# Altium PCB attenuator-pcb - 2.PcbDoc
Units mm, origin at the board's own origin, x right, y up, seen from the top; angles counter-clockwise.
Board outline 38.59 x 22.51 mm, 2 copper layers (Top Layer, Bottom Layer), stack 1.56 mm thick; 10 components, 37 nets, 26 pads, 35 vias.
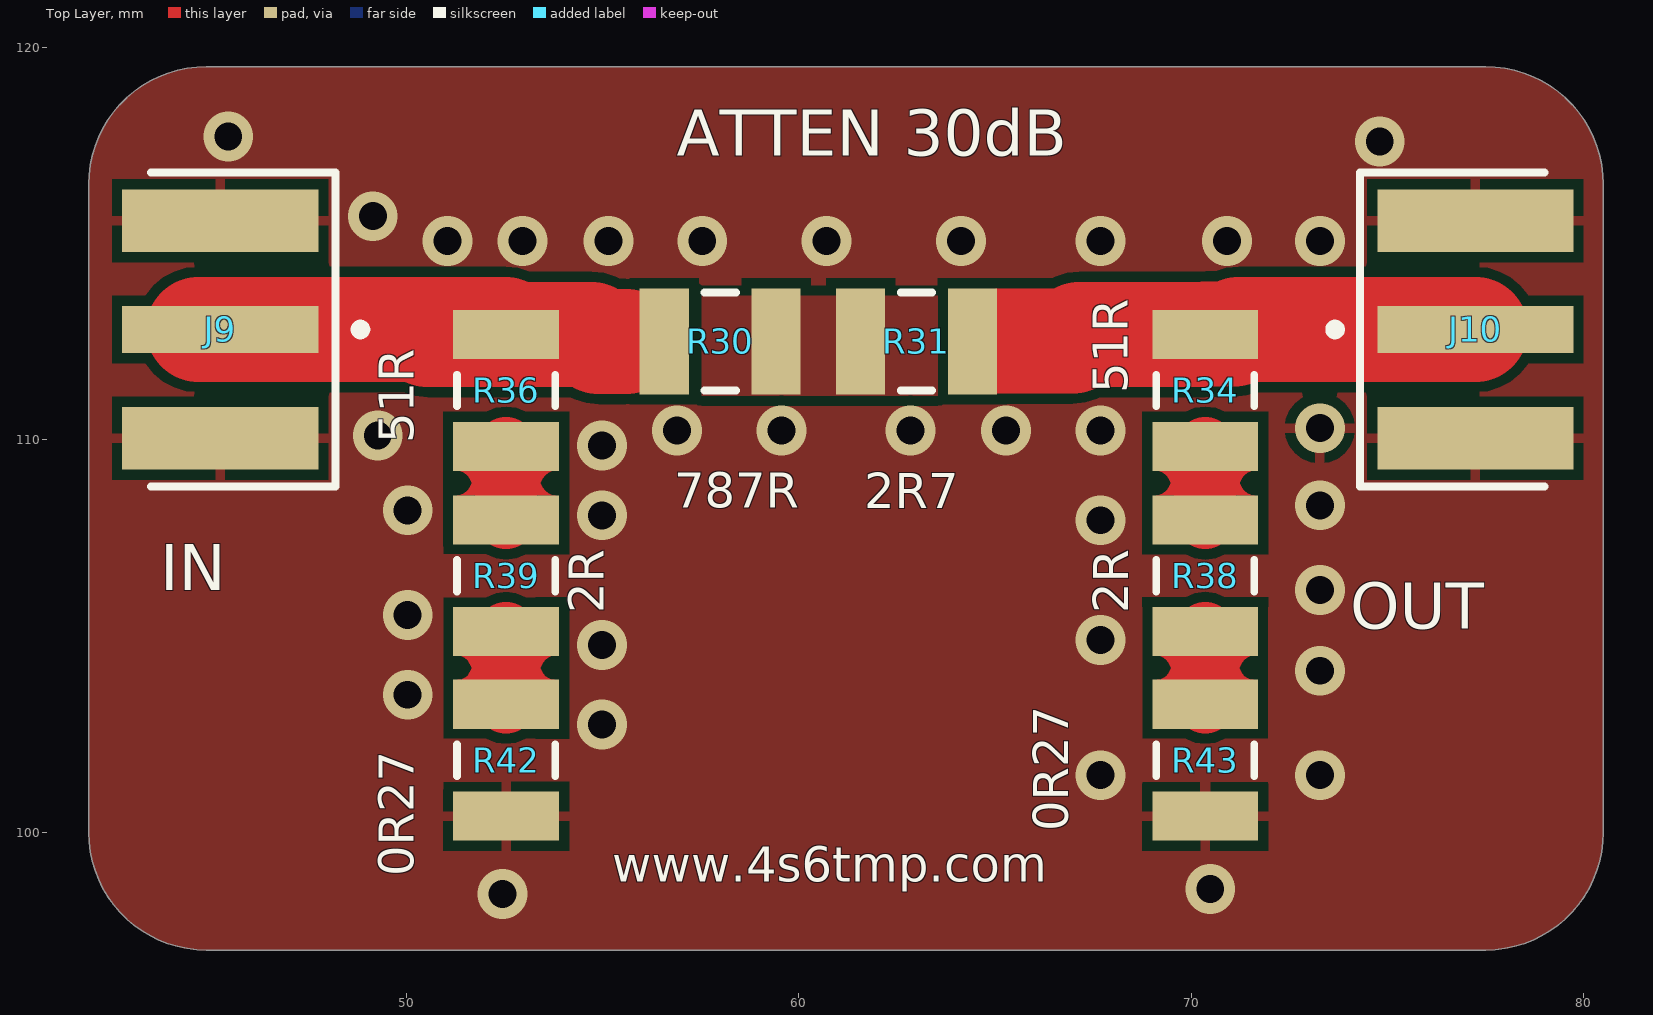
[diagram p0: Top Layer view]
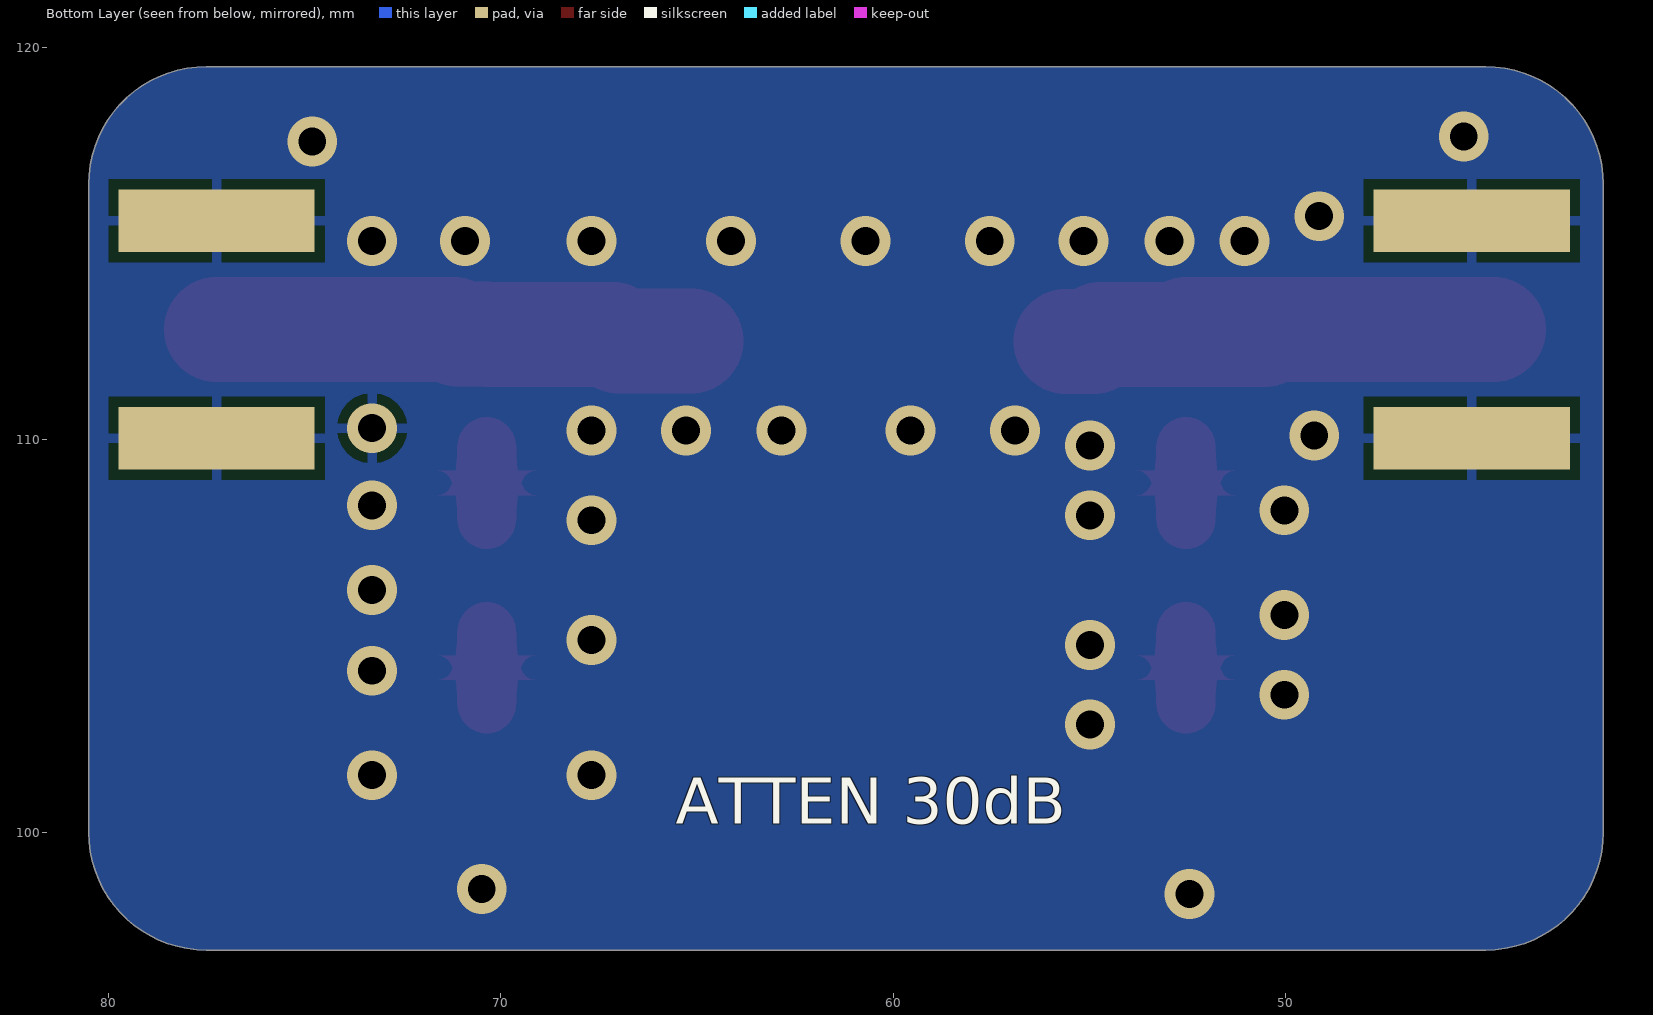
[diagram p1: Bottom Layer view, seen from below]

## Layer stack, top to bottom
Top Solder: solder mask 0.0203, Solder Resist, Dk 3.8
Top Layer: signal copper 0.035
Prepreg 7628: dielectric 1.49, FR-4, Dk 4.6
Bottom Layer: signal copper 0.035
Bottom Solder: solder mask 0.0203, Solder Resist, Dk 3.8

## Board outline
41.91,100 41.91,116.507 cw(c44.91,116.507) 44.91,119.507 77.5,119.507 cw(c77.5,116.507) 80.5,116.507 80.5,100 cw(c77.5,100) 77.5,97 44.91,97 cw(c44.91,100)

## Design rules (kind name [scope] priority, off if disabled: settings)
Clearance [All] p1: gap=0.254 ignorepadtopadclearanceinfootprint=FALSE except(0: Arc-Hole Track-Hole SMDPad-Hole THPad-Hole Via-Hole Fill-Hole Poly-Hole Region-Hole Text-Hole)
HoleToHoleClearance [All] p1: gap=0.1 allowstackedmicrovias=TRUE
MinimumSolderMaskSliver [All] p1 off: minsoldermaskwidth=0.1
PolygonConnect [All] p1: connectstyle=Relief reliefconductorwidth=0.254 reliefentries=4 polygonreliefangle="90 Angle" airgapwidth=0.254
RoomDefinition schematic [InComponentClass('schematic')] p1: confinementstyle=ConfineIn formatcopy=TRUE lockcomponents=FALSE outline 28.829,93.726 92.964,93.726 92.964,120.015 28.829,120.015
RoutingVias [All] p1: holewidth=0.711 width=1.27 viastyle="Through Hole" minholewidth=0.711 minwidth=1.27 maxholewidth=0.711 maxwidth=1.27
SolderMaskExpansion [All] p1: expansion=0.102 istentingtop=FALSE
Width [All] p1: maxlimit=3 minlimit=1.5 preferedwidth=2.673 impedanceprofiledriven=TRUE impedanceprofileid={88FF0C83-8680-40BB-AEE6-F79FA2882ED4} impedanceprofilevalue=50.000000 minimp=50.000000 maximp=50.000000 favimp=50.000000
Width Width_1 [All] p2: maxlimit=2 minlimit=0.254 preferedwidth=1 minimp=50.000000 maximp=50.000000 favimp=50.000000
28 further rules are at their usual default settings.

## Components (designator, comment, footprint, x,y, rotation, side; value= is the part's Value field where it differs from the comment)
J9 "IN" FP-CON-SMA-EDGE-S-MFG 38,112.811 r90 top
J10 "OUT" FP-CON-SMA-EDGE-S-MFG 84.5,112.811 r270 top
R30 "787R" RESC3225X70X50NL20T20 58,112.506 r0 top
R31 "2R7" RESC3225X70X50NL20T20 63,112.506 r0 top
R34 "51R" RESC3225X70X50NL20T20 70.358,111.259 r90 top
R36 "51R" RESC3225X70X50NL20T20 52.546,111.259 r90 top
R38 "2R" RESC3225X70X50NL20T20 70.358,106.537 r90 top
R39 "2R" RESC3225X70X50NL20T20 52.546,106.537 r90 top
R42 "0R27" RESC3225X70X50NL20T20 52.546,101.838 r90 top
R43 "0R27" RESC3225X70X50NL20T20 70.358,101.838 r90 top

## Footprints (in the part's own frame and the unit in brackets; to place one, negate y for a bottom-side part, rotate by r counter-clockwise, add the part's x,y. Pads: shape width x height; smd on the part's side, far side on the other; paste and mask are expansions set on the pad)
FP-CON-SMA-EDGE-S-MFG [mm]
  rect 1.2x5 smd paste+0 mask+0: 1(0,-7.26)
  rect 1.6x5 smd paste+0 mask+0: 2(-2.77,-7.26) 3(2.77,-7.26)
  rect 1.6x5 smd far side paste+0 mask+0: 4(-2.77,-7.26) 5(2.77,-7.26)
  silkscreen extent -4,-10.96 4,-5.5, body extent -3.67,-9.86 3.67,4.86, height 0.25
RESC3225X70X50NL20T20 [mm] "Chip Resistor, 2-Leads, Body 3.20x2.50mm, IPC Medium Density"
  rect 1.25x2.7 smd: 1(-1.425,0) 2(1.425,0)
  silkscreen extent -0.4,-1.25 0.4,1.25, body extent -1.7,-1.35 1.7,1.35, height 0.7

## Part data
J9 J10: library part CMP-204357-000001-1, "CONN SMA JACK STR EDGE MNT", Frequency=18GHz, Manufacturer="RF Solutions Ltd.", Manufacturer Part Number=CON-SMA-EDGE-S, Package=CONN_JACK, Automotive=No, Category=Conn, ComponentLink2Description=Datasheet, ComponentLink2URL=https://www.rfsolutions.co.uk/downloads/1498648656DS-CON-EDGE-SMA-4.pdf, Conn Orientation="Right Angle", Contact Material=Gold, Device Class L1=Connectors, Device Class L2="RF / Coaxial Connectors", Device Class L3=unset, Digikey Description="CONN SMA JACK STR EDGE MNT", Footprint Url=https://forum.upverter.com/uploads/default/original/3X/b/e/be75b907af57498775929d6d9099689c472e0307.pdf, Height=6.35mm, Impedance=50Ω, Is Female=yes, Lead Free=Yes, Number Of Contacts=1, Octopart=https://octopart.com/con-sma-edge-s-rf+solutions-70967450, RoHS=TRUE, Shielding=true
R30 R31 R34 R36 R38 R39 R42 R43: library part CMP-2005-01957-1, Manufacturer=Panasonic, Part Number=ERJ-14NF1001U

## Via types
v1: diameter 1.27, hole 0.711, Top Layer to Bottom Layer, 35 vias

## Nets (pads, with @x,y where several pads share a name; then routed paths per layer and width w, separated by ;. In a path a pad name is that pad's centre, name@x,y a point inside that pad or via, vN(x,y) a via of type N, cw(c..) or ccw(c..) an arc to the next point about the centre after c; other vN are vias at no path point)
GND: J9.2 J9.3 J9.4 J9.5 J10.2 J10.3 J10.4 J10.5 R42.1 R43.1
  other v1: 52.451,98.425 70.485,98.552 67.691,101.456 73.279,101.456 54.991,102.743 50.038,103.505 73.279,104.117 54.991,104.775 67.691,104.899 50.038,105.537 73.279,106.172 67.691,107.95 54.991,108.077 50.038,108.204 73.279,108.331 54.991,109.855 49.276,110.109 56.896,110.236 59.563,110.236 62.849,110.236 65.278,110.236 67.691,110.236 73.279,110.297 51.054,115.062 52.959,115.062 55.157,115.062 57.542,115.062 60.706,115.062 64.135,115.062 67.691,115.062 70.908,115.062 73.279,115.062 49.149,115.697 74.803,117.602 45.466,117.729
NetJ1_1: 
NetJ2_1: 
NetJ3_1: 
NetJ4_1: 
NetJ5_1: 
NetJ6_1: 
NetJ7_1: 
NetJ8_1: 
NetJ9_1: J9.1 R30.1 R36.2 | length 13
  Top Layer w2.673: J9.1@44.704,112.811 J9.1 52.532,112.811 R36.2@52.546,112.797 ; 50.546,112.684 R36.2 54.722,112.684 54.9,112.506 55.598,112.506
NetJ10_1: J10.1 R31.2 R34.2 | length 12.2
  Top Layer w2.673: 65.148,112.519 66.984,112.519 67.148,112.684 R34.2 70.372,112.698 71.097,112.698 71.21,112.811 J10.1
NetJ11_1: 
NetJ12_1: 
NetR1_2: 
NetR2_2: 
NetR4_2: 
NetR6_1: 
NetR7_1: 
NetR12_2: 
NetR13_2: 
NetR15_2: 
NetR17_2: 
NetR18_2: 
NetR20_1: 
NetR21_1: 
NetR22_1: 
NetR23_1: 
NetR24_1: 
NetR25_1: 
NetR30_2: R30.2 R31.1
NetR32_2: 
NetR34_1: R34.1 R38.2 | length 1.9
  Top Layer w1.5: R38.2 R34.1
NetR35_1: 
NetR36_1: R36.1 R39.2 | length 1.9
  Top Layer w1.5: R39.2 R36.1
NetR37_1: 
NetR38_1: R38.1 R43.2 | length 1.8
  Top Layer w1.5: R43.2 R38.1
NetR39_1: R39.1 R42.2 | length 1.8
  Top Layer w1.5: R42.2 R39.1

## Polygon pours and split planes (outlines as drawn)
GND on Top Layer "Top Layer-No Net" (solid, pour order 13): 41.91,100 41.91,116.507 cw(c44.91,116.507) 44.91,119.507 77.5,119.507 cw(c77.5,116.507) 80.5,116.507 80.5,100 cw(c77.5,100) 77.5,97 44.91,97 cw(c44.91,100)
GND on Top Layer "Top Layer-GND 19" (solid, pour order 9): 67.472,105.737 73.244,105.737 73.244,104.487 73.215,104.187 73.244,103.888 73.244,102.638 73.215,102.338 73.128,102.05 72.986,101.784 72.794,101.551 72.562,101.36 72.296,101.218 72.008,101.131 71.708,101.101 71.105,101.101 71.048,101.077 70.95,101.054 70.854,101.025 70.803,101.02 70.754,101.009 70.559,100.983 70.508,100.981 70.458,100.973 70.358,100.977 70.258,100.973 70.208,100.981 70.157,100.983 69.962,101.009 69.913,101.02 69.862,101.025 69.766,101.054 69.668,101.077 69.622,101.098 69.008,101.101 68.708,101.131 68.42,101.218 68.154,101.36 67.922,101.551 67.73,101.784 67.588,102.05 67.501,102.338 67.472,102.638 67.472,103.888 67.501,104.187 67.472,104.487
GND on Top Layer "Top Layer-GND 1" (solid, pour order 7): 52.196,107.244 52.484,107.156 52.75,107.014 52.982,106.823 53.174,106.591 53.316,106.325 53.403,106.037 53.432,105.737 53.432,104.487 53.403,104.187 53.432,103.888 53.432,102.638 53.403,102.338 53.316,102.05 53.174,101.784 52.982,101.551 52.75,101.36 52.484,101.218 52.196,101.131 51.896,101.101 49.196,101.101 48.896,101.131 48.608,101.218 48.342,101.36 48.11,101.551 47.918,101.784 47.776,102.05 47.689,102.338 47.66,102.638 47.66,103.888 47.689,104.187 47.66,104.487 47.66,105.737 47.689,106.037 47.776,106.325 47.918,106.591 48.11,106.823 48.342,107.014 48.608,107.156 48.896,107.244 49.196,107.273 51.896,107.273
NetR30_2 on Top Layer "NETR30_2_L01_P002" (solid, remove dead copper, pour order 2): 57.531,113.665 64.135,113.665 64.135,111.125 57.531,111.125
GND on Bottom Layer "Top Layer-GND" (solid, pour order 14): 41.91,100 41.91,116.507 cw(c44.91,116.507) 44.91,119.507 77.5,119.507 cw(c77.5,116.507) 80.5,116.507 80.5,100 cw(c77.5,100) 77.5,97 44.91,97 cw(c44.91,100)

## Silkscreen, mask and mechanical layers (free items; w line width, h text height)
Top Overlay:
  text "ATTEN 30dB" at 56.888,116.854 h2
  text "www.4s6tmp.com" at 55.245,98.442 h1.52
Bottom Overlay:
  text "ATTEN 30dB" at 65.54,99.836 h2
Mechanical 1:
  lines w0.254: 41.91,116.459 41.91,100 ccw(c44.91,100) 44.91,97 77.5,97 ccw(c77.5,100) 80.5,100 80.5,116.507 ccw(c77.5,116.507) 77.5,119.507 44.91,119.507 ccw(c44.91,116.507) 41.91,116.507